# Altium PCB PCB_Slave_Traffic_Light.PcbDoc
Units mil, origin at the board's own origin, x right, y up, seen from the top; angles counter-clockwise.
Board outline 4789.4 x 2774.4 mil, 2 copper layers (Top Layer, Bottom Layer); 5 components, 10 nets, 72 pads, 3 vias.
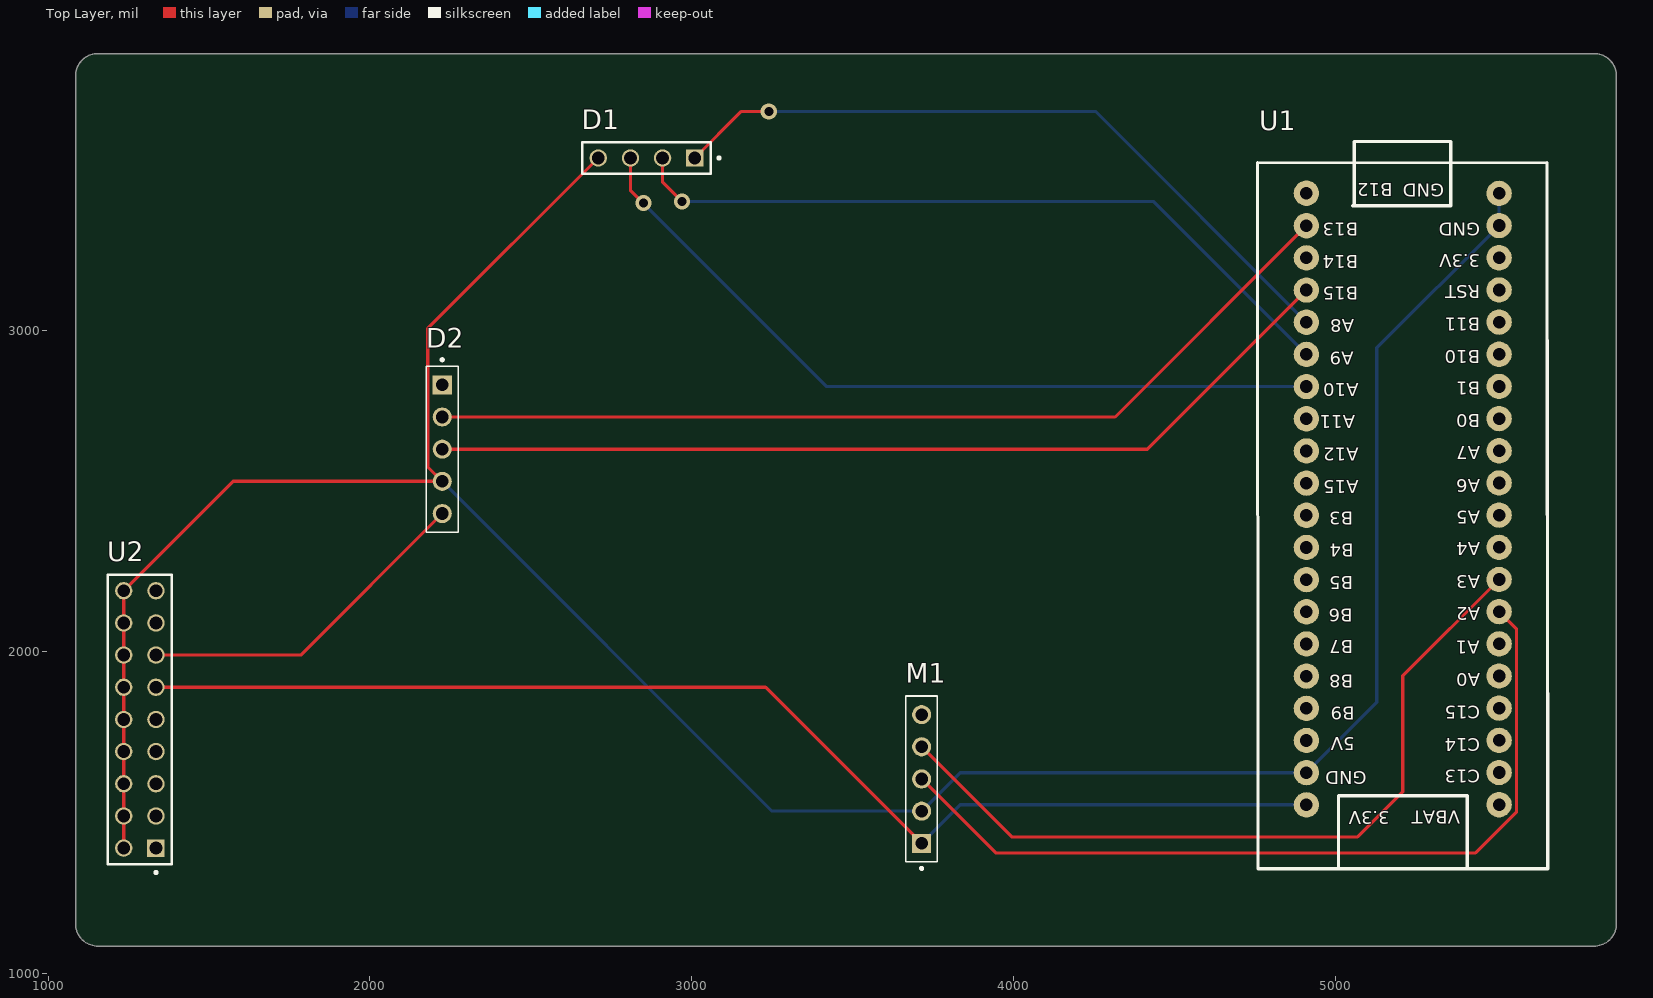
[diagram p0: Top Layer view]
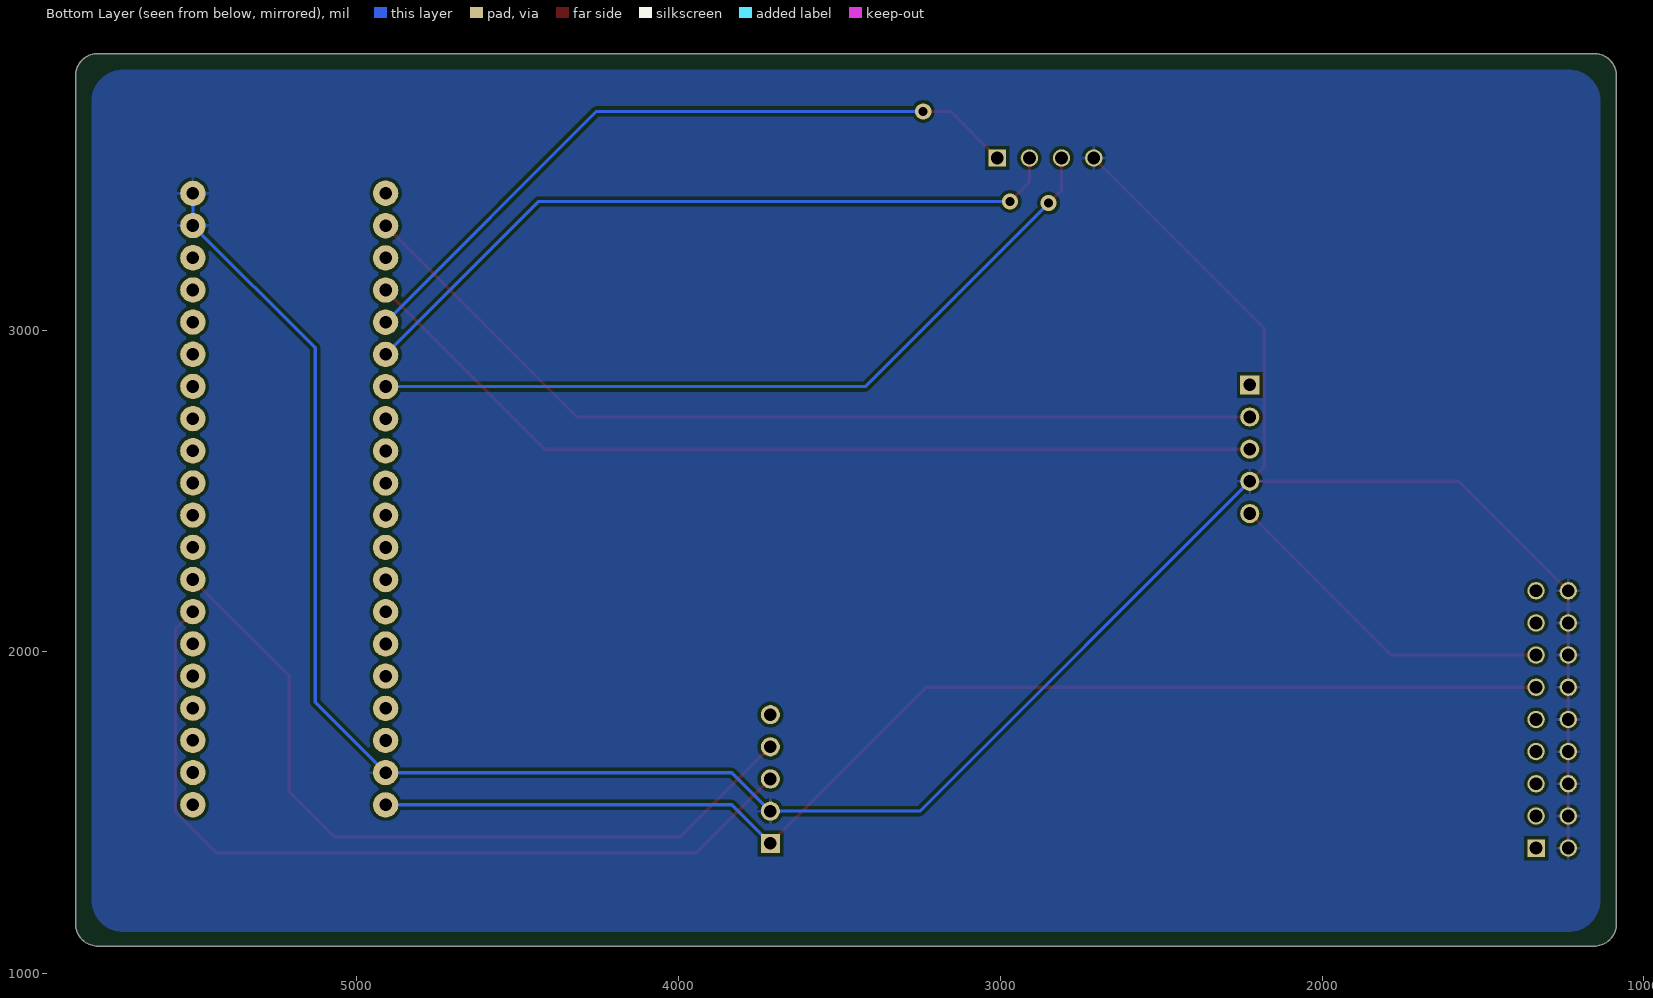
[diagram p1: Bottom Layer view, seen from below]

## Layer stack, top to bottom
Top Solder: solder mask 0.4, Solder Resist, Dk 3.5
Top Layer: signal copper 1.4
Dielectric 1: dielectric 12.6, FR-4, Dk 4.8
Bottom Layer: signal copper 1.4
Bottom Solder: solder mask 0.4, Solder Resist, Dk 3.5

## Board outline
1085.3,1155 1085.3,3790 cw(c1155,3790) 1155,3859.7 5805,3859.7 cw(c5805,3790) 5874.7,3790 5874.7,1155 cw(c5805,1155) 5805,1085.3 1155,1085.3 cw(c1155,1155)

## Design rules (kind name [scope] priority, off if disabled: settings)
Clearance [All] p1: gap=10 ignorepadtopadclearanceinfootprint=FALSE
PolygonConnect [All] p1: connectstyle=Relief reliefconductorwidth=10 reliefentries=4 polygonreliefangle="90 Angle" airgapwidth=10
RoutingVias [All] p1: holewidth=28 width=50 viastyle="Through Hole" minholewidth=28 minwidth=50 maxholewidth=28 maxwidth=50
SolderMaskExpansion [All] p1: expansion=4 istentingtop=FALSE
SupplyNets "Schematic Supply Nets" [InNet('GND')] p1: voltage=0.000
Width [All] p1: maxlimit=10 minlimit=10 preferedwidth=10
30 further rules are at their usual default settings.

## Components (designator, comment, footprint, x,y, rotation, side; value= is the part's Value field where it differs from the comment)
D1 "Traffic Light" SAMTEC_HTSW-104-23-SM-S 2860,3535 r0 top
D2 "LED1" HARWIN_M20-7820546 2225,2630 r90 top
M1 "HC12" HARWIN_M20-7820546 3715,1605 r270 top
U1 "STM32F103C8T6" "Stm32 BluePill" 5219.2,2248.07 r180 top
U2 "ASM1117" SAMTEC_MTSW-109-13-G-D-905 1335,1390 r90 top

## Footprints (in the part's own frame and the unit in brackets; to place one, negate y for a bottom-side part, rotate by r counter-clockwise, add the part's x,y. Pads: shape width x height; smd on the part's side, far side on the other; paste and mask are expansions set on the pad)
HARWIN_M20-7820546 [mm]
  rect 1.508x1.508 / inner round 1.508 / far side rect 1.508x1.508 hole 1: 1(5.08,0)
  round 1.508 hole 1: 2(2.54,0) 3(0,0) 4(-2.54,0) 5(-5.08,0)
  silkscreen extent -6.55,-1.25 7.16,1.25
SAMTEC_HTSW-104-23-SM-S [mm]
  rect 1.37x1.37 / inner round 1.37 / far side rect 1.37x1.37 hole 1.02: 01(3.81,0)
  round 1.37 hole 1.02: 02(1.27,0) 03(-1.27,0) 04(-3.81,0)
  silkscreen extent -5.08,-1.24 5.83,1.24
SAMTEC_MTSW-109-13-G-D-905 [mm]
  rect 1.37x1.37 hole 1.02: 01(0,0)
  round 1.37 hole 1.02: 02(0,2.54) 03(2.54,0) 04(2.54,2.54) 05(5.08,0) 06(5.08,2.54) 07(7.62,0) 08(7.62,2.54) 09(10.16,0) 10(10.16,2.54) 11(12.7,0) 12(12.7,2.54) 13(15.24,0) 14(15.24,2.54) 15(17.78,0) 16(17.78,2.54) 17(20.32,0) 18(20.32,2.54)
  silkscreen extent -2.02,-1.27 21.59,3.81
"Stm32 BluePill" [mm]
  round 2 hole 1: 1(7.828,-29.909) 2(7.828,-27.343) 3(7.828,-24.803) 4(7.828,-22.263) 5(7.828,-19.723) 6(7.828,-17.183) 7(7.828,-14.643) 8(7.828,-12.103) 9(7.828,-9.563) 10(7.828,-7.023) 11(7.828,-4.483) 12(7.828,-1.943) 13(7.828,0.597) 14(7.828,3.137) 15(7.828,5.677) 16(7.828,8.217) 17(7.828,10.757) 18(7.828,13.297) 19(7.828,15.837) 20(7.828,18.377) 21(-7.386,18.366) 22(-7.386,15.826) 23(-7.386,13.286) 24(-7.386,10.746) 25(-7.386,8.206) 26(-7.386,5.666) 27(-7.386,3.126) 28(-7.386,0.586) 29(-7.386,-1.954) 30(-7.386,-4.494) 31(-7.386,-7.034) 32(-7.386,-9.574) 33(-7.386,-12.114) 34(-7.386,-14.654) 35(-7.386,-17.194) 36(-7.386,-19.734) 37(-7.386,-22.274) 38(-7.386,-24.814) 39(-7.386,-27.354) 40(-7.386,-29.894)
  silkscreen extent -11.22,-34 11.69,23.43, body extent -11.18,-33.27 11.68,24.29, height 12.31

## Part data
D1: library part HTSW-104-23-SM-S, "HEADER, 4 CONTACTS, 1 ROW, THROUGH HOLE, 2.54 MM; Connector Systems:Board-to-Board; Pitch Spacing:2.54mm; No. of Rows:1Rows; No. of Contacts:4Contacts; Contact Termination Type:Through Hole; Product Range:HTSW Series; Gender:Header RoHS Compliant: Yes", Package=None, Availability="In Stock", Check_prices=https://www.snapeda.com/parts/HTSW10423SMS/Samtec/view-part/?ref=eda, MF=Samtec, MP=HTSW10423SMS, Price=None, Purchase-URL=https://pricing.snapeda.com/search/part/HTSW10423SMS/?ref=eda, SnapEDA_Link=https://www.snapeda.com/parts/HTSW10423SMS/Samtec/view-part/?ref=snap
D2 M1: library part M20-7820546, Package=None, Availability=Unavailable, MP=M20-7820546, Price=None
U1: library part BluePill, "Designed By @Alixahedi"
U2: library part MTSW-109-13-G-D-905, Package=None, Availability=Unavailable, MP=MTSW-109-13-G-D-905, Price=None

## Via types
v1: diameter 50, hole 28, Top Layer to Bottom Layer, 3 vias

## Nets (pads, with @x,y where several pads share a name; then routed paths per layer and width w, separated by ;. In a path a pad name is that pad's centre, name@x,y a point inside that pad or via, vN(x,y) a via of type N, cw(c..) or ccw(c..) an arc to the next point about the centre after c; other vN are vias at no path point)
GND: D1.04 D2.4 M1.2 U1.19 U1.39 U1.40 U2.02 U2.04 U2.06 U2.08 U2.10 U2.12 U2.14 U2.16 U2.18 | length 8382.4
  Top Layer w10: U2.02 U2.04 U2.06 U2.08 U2.10 U2.12 U2.14 U2.16 U2.18 1575,2530 D2.4 2180.31,2574.69 2180.31,3005.31 D1.04
  Bottom Layer w10: D2.4 3250,1505 M1.2 3834.57,1624.57 U1.19 5130,1843.57 5130,2945 U1.39 U1.40
Out3.3: M1.1 U1.20 U2.11 | length 3826.4
  Top Layer w10: U2.11 3230,1890 M1.1
  Bottom Layer w10: M1.1 3834.57,1524.57 U1.20
Out5: D2.5 U2.13 | length 1072.3
  Top Layer w10: U2.13 1785,1990 D2.5
PA2: M1.3 U1.27 | length 2642.5
  Top Layer w10: M1.3 3945,1375 5436.89,1375 5564.37,1502.48 5564.37,2070.63 U1.27
PA3: M1.4 U1.28 | length 2453.2
  Top Layer w10: M1.4 3995,1425 5070,1425 5210.53,1565.53 5210.53,1925.53 U1.28
PA8: D1.01 U1.5 | length 2232.5
  Top Layer w10: D1.01 3155,3680 v1(3240,3680)
  Bottom Layer w10: v1(3240,3680) 4255.57,3680 U1.5
PA9: D1.02 U1.6 | length 2297.8
  Top Layer w10: D1.02 2910,3460 v1(2970,3400)
  Bottom Layer w10: v1(2970,3400) 4435.57,3400 U1.6
PA10: D1.03 U1.7 | length 2453.8
  Top Layer w10: D1.03 2810,3435 v1(2850,3395)
  Bottom Layer w10: v1(2850,3395) 3420.43,2824.57 U1.7
PB13: D2.2 U1.2 | length 2932.3
  Top Layer w10: D2.2 4316.43,2730 U1.2
PB15: D2.3 U1.4 | length 2890.9
  Top Layer w10: D2.3 4416.43,2630 U1.4
pads on no net: D2.1 M1.5 U1.1 U1.3 U1.8 U1.9 U1.10 U1.11 U1.12 U1.13 U1.14 U1.15 U1.16 U1.17 U1.18 U1.21 U1.22 U1.23 U1.24 U1.25 U1.26 U1.29 U1.30 U1.31 U1.32 U1.33 U1.34 U1.35 U1.36 U1.37 U1.38 U2.01 U2.03 U2.05 U2.07 U2.09 U2.15 U2.17

## Polygon pours and split planes (outlines as drawn)
GND on Bottom Layer "NONET_L-01_P-001" (solid, pour order 0): 1235,1130 cw(c1235,1230) 1135,1230 1135,3710 cw(c1235,3710) 1235,3810 5725,3810 cw(c5725,3710) 5825,3710 5825,1230 cw(c5725,1230) 5725,1130

## Silkscreen, mask and mechanical layers (free items; w line width, h text height)
Mechanical 1:
  lines w39.37: 2735,1105 5805,1105 ccw(c5805,1155) 5855,1155 5855,3790 ccw(c5805,3790) 5805,3840 1155,3840 ccw(c1155,3790) 1105,3790 1105,1155 ccw(c1155,1155) 1155,1105 2760,1105

## Text inside footprints (layer, text, board x,y; h text height)
U1: Top Overlay "5V" at 5062,1748.3 h70 r180; Top Overlay "B9" at 5062,1843.3 h70 r180; Top Overlay "B8" at 5057,1943.3 h70 r180; Top Overlay "3.3V" at 5170,1519.22 h70 r180; Top Overlay "GND" at 5099.2,1642.3 h70 r180; Top Overlay "A5" at 5452,2453.3 h70 r180; Top Overlay "A2" at 5452,2152.07 h70 r180; Top Overlay "A3" at 5452,2252.3 h70 r180; Top Overlay "A4" at 5452,2354.07 h70 r180; Top Overlay "RST" at 5452,3153.3 h70 r180; Top Overlay "B10" at 5452,2951.3 h70 r180; Top Overlay "B11" at 5452,3053.07 h70 r180; Top Overlay "A6" at 5452,2551.3 h70 r180; Top Overlay "A7" at 5452,2653.07 h70 r180; Top Overlay "B0" at 5452,2753.3 h70 r180; Top Overlay "B1" at 5452,2854.07 h70 r180; Top Overlay "3.3V" at 5452,3250.3 h70 r180; Top Overlay "B15" at 5071.6,3149.3 h70 r180; Top Overlay "A8" at 5059.5,3048.3 h70 r180; Top Overlay "A11" at 5062.8,2750.07 h70 r180; Top Overlay "B3" at 5057,2449.3 h70 r180; Top Overlay "A9" at 5058.3,2947.3 h70 r180; Top Overlay "A15" at 5074.1,2547.3 h70 r180; Top Overlay "A12" at 5074.1,2649.07 h70 r180; Top Overlay "A10" at 5074.1,2849.3 h70 r180; Top Overlay "VBAT" at 5389.94,1520 h70 r180; Top Overlay "B5" at 5057,2248.3 h70 r180; Top Overlay "B14" at 5072.8,3247.07 h70 r180; Top Overlay "B7" at 5057,2050.07 h70 r180; Top Overlay "B4" at 5058.3,2350.07 h70 r180; Top Overlay "B6" at 5055.8,2147.3 h70 r180; Top Overlay "C15" at 5452,1846.3 h70 r180; Top Overlay "C13" at 5452,1647.3 h70 r180; Top Overlay "C14" at 5452,1745.3 h70 r180; Top Overlay "A0" at 5452,1947.3 h70 r180; Top Overlay "A1" at 5449.2,2048.07 h70 r180; Top Overlay "GND" at 5452,3348.3 h70 r180; Top Overlay "B13" at 5072,3348.3 h70 r180; Top Overlay "GND" at 5340,3469.22 h70 r180; Top Overlay "B12" at 5180,3470 h70 r180